# Altium PCB TCRT5000_pcb.PcbDoc
Units mm, origin at the board's own origin, x right, y up, seen from the top; angles counter-clockwise.
Board outline 110 x 45 mm, 2 copper layers (Top Layer, Bottom Layer), stack 1.58 mm thick; 29 components, 16 nets, 100 pads, 7 vias.
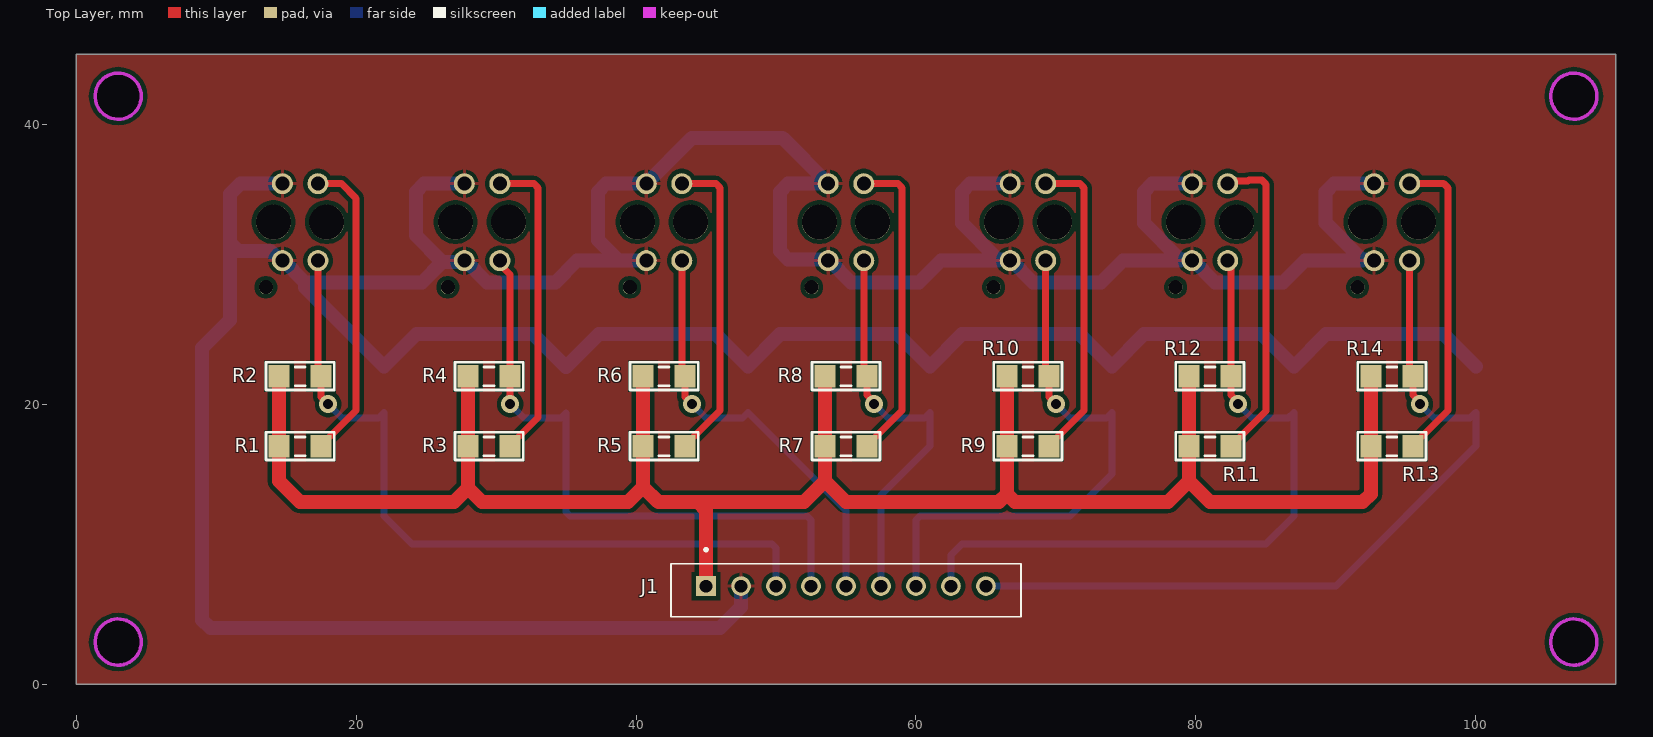
[diagram p0: Top Layer view]
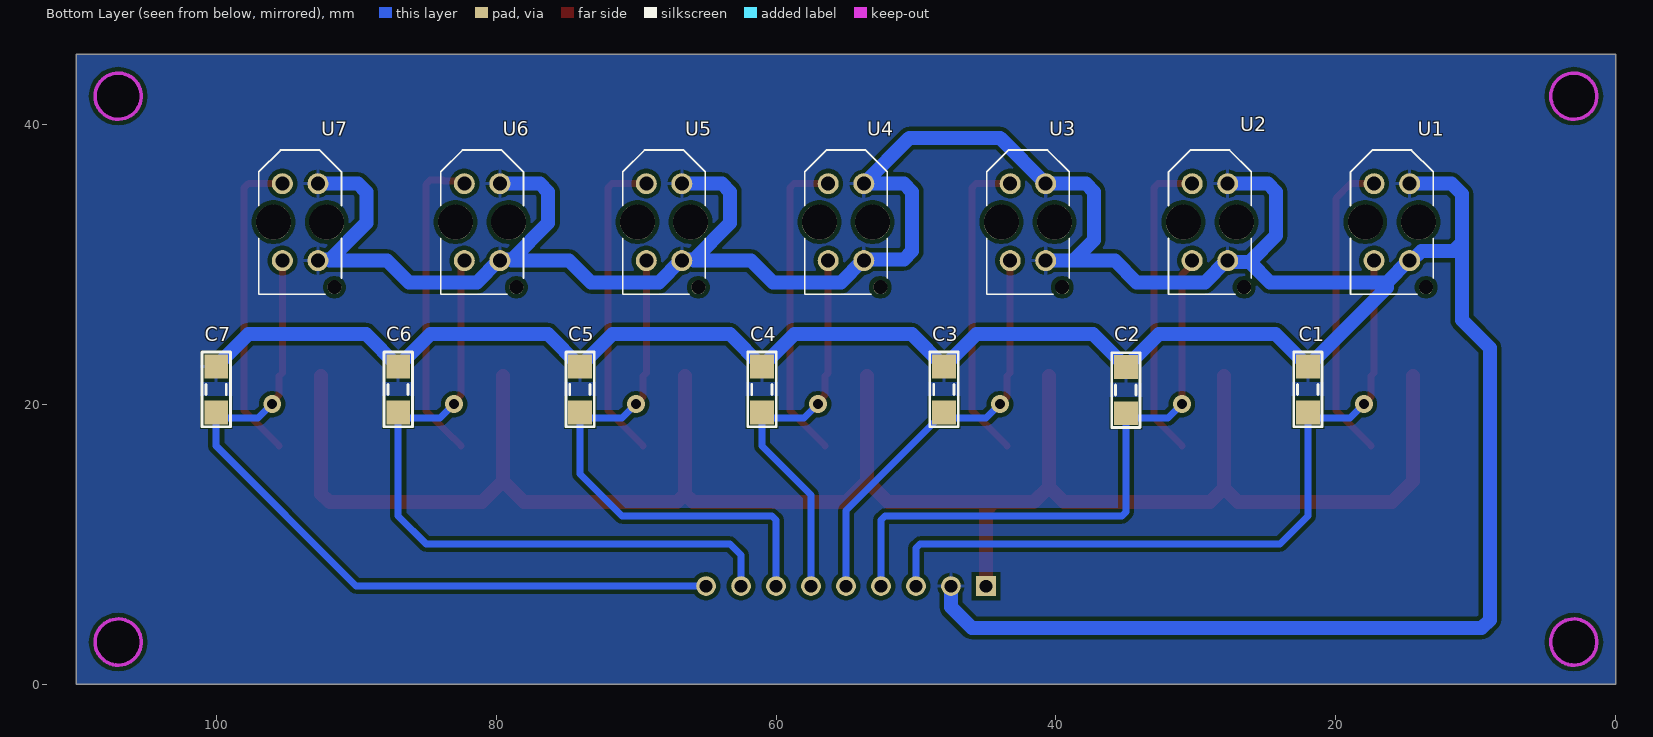
[diagram p1: Bottom Layer view, seen from below]
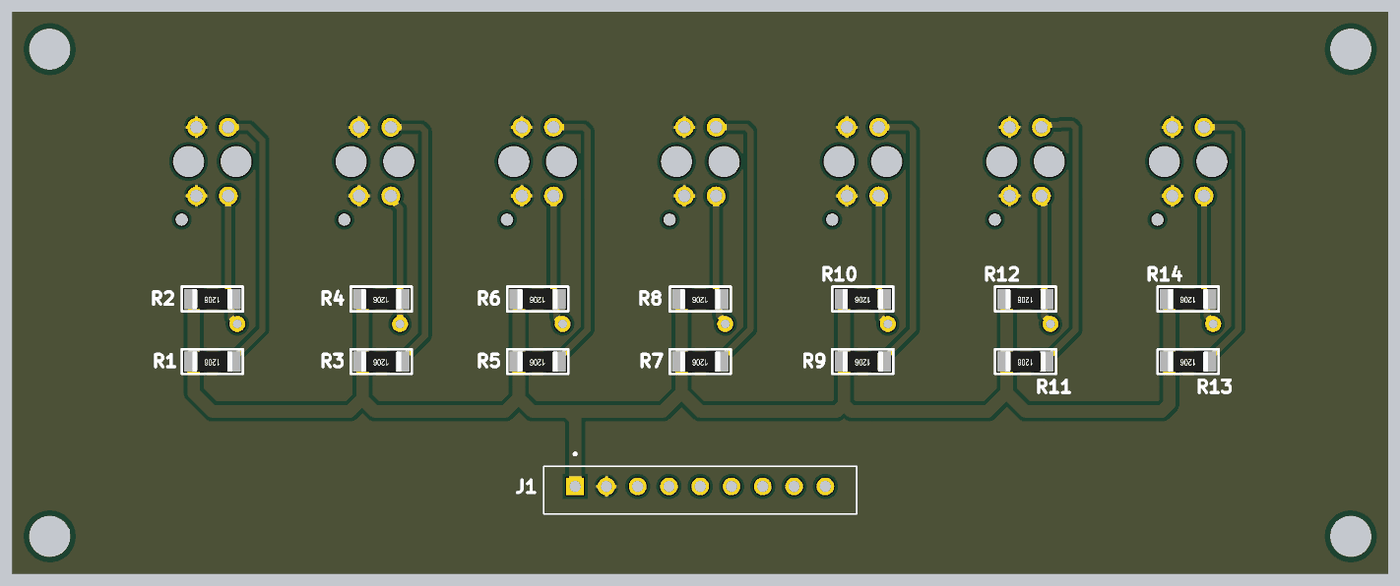
[diagram p2: 3D render of the assembled board from above, using the file's embedded part models]
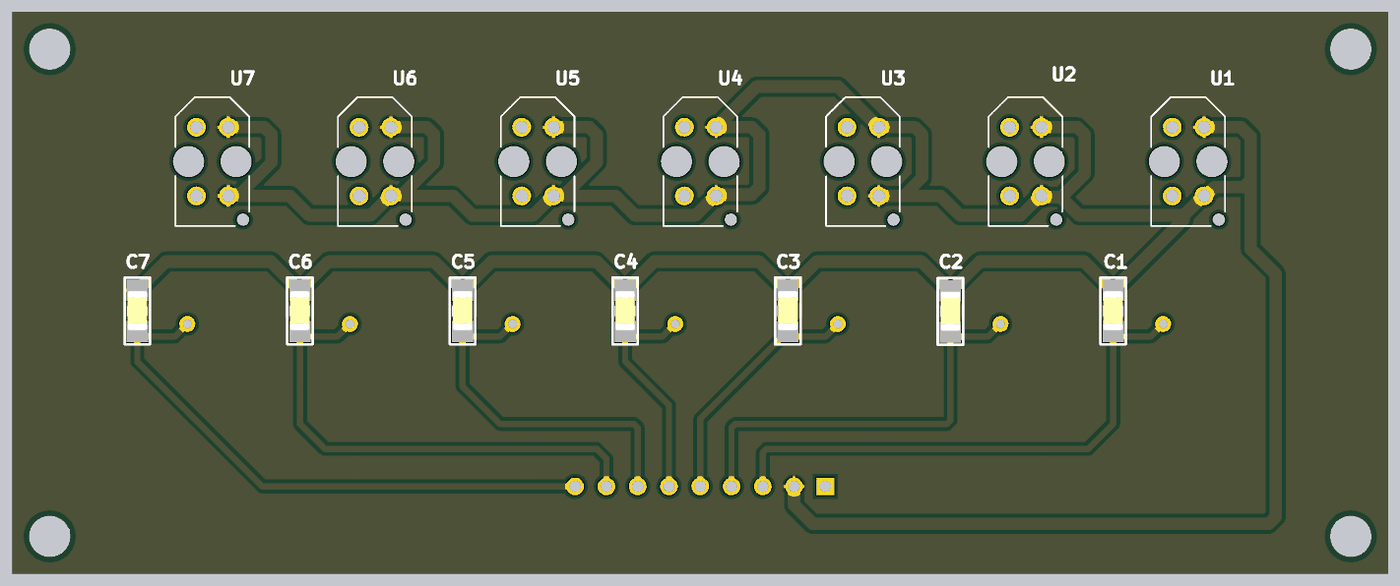
[diagram p3: 3D render of the assembled board from below, using the file's embedded part models]

## Layer stack, top to bottom
Top Solder: solder mask 0.01, Solder Resist, Dk 3.5
Top Layer: signal copper 0.035
Dielectric 1: dielectric 1.51, FR-4, Dk 4.8
Bottom Layer: signal copper 0.035
Bottom Solder: solder mask 0.01, Solder Resist, Dk 3.5

## Board outline
0,0 110,0 110,45 0,45
cut-out: 3,40.35 cw(c3,42) 1.35,42 cw(c3,42) 3,43.65 cw(c3,42) 4.65,42 cw(c3,42)
cut-out: 107,40.35 cw(c107,42) 105.35,42 cw(c107,42) 107,43.65 cw(c107,42) 108.65,42 cw(c107,42)
cut-out: 107,1.35 cw(c107,3) 105.35,3 cw(c107,3) 107,4.65 cw(c107,3) 108.65,3 cw(c107,3)
cut-out: 3,1.35 cw(c3,3) 1.35,3 cw(c3,3) 3,4.65 cw(c3,3) 4.65,3 cw(c3,3)

## Design rules (kind name [scope] priority, off if disabled: settings)
Clearance [All] p1: gap=0.3 ignorepadtopadclearanceinfootprint=FALSE
PolygonConnect [All] p1: connectstyle=Relief reliefconductorwidth=0.254 reliefentries=4 polygonreliefangle="90 Angle" airgapwidth=0.254
RoutingVias [All] p1: holewidth=0.711 width=1.27 viastyle="Through Hole" minholewidth=0.711 minwidth=1.27 maxholewidth=0.711 maxwidth=1.27
SilkToSolderMaskClearance [IsPad] p1: minsilkscreentomaskgap=0.1 clearancetoexposedcopper=TRUE
SolderMaskExpansion [All] p1: expansion=0.102 istentingtop=FALSE
Width GND [InNet('GND')] p1: maxlimit=1.5 minlimit=0.5 preferedwidth=1
Width 5V [InNet('+5')] p2: maxlimit=1.5 minlimit=0.5 preferedwidth=1
Width Signal [All] p3: maxlimit=0.8 minlimit=0.3 preferedwidth=0.5
29 further rules are at their usual default settings.

## Components (designator, comment, footprint, x,y, rotation, side; value= is the part's Value field where it differs from the comment)
C1 "104" "tu 1206" 21.997,21.046 r90 bottom
C2 "104" "tu 1206" 35,21 r90 bottom
C3 "104" "tu 1206" 47.997,21.046 r90 bottom
C4 "104" "tu 1206" 60.997,21.046 r90 bottom
C5 "104" "tu 1206" 73.997,21.046 r90 bottom
C6 "104" "tu 1206" 86.997,21.046 r90 bottom
C7 "104" "tu 1206" 99.997,21.046 r90 bottom
J1 "440052-9" TE_440052-9 55,7 r0 top
R1 "220R" "tro smd 1206" 16,17 r180 top
R2 "5.1k" "tro smd 1206" 16,22 r180 top
R3 "220R" "tro smd 1206" 29.5,17 r180 top
R4 "5.1k" "tro smd 1206" 29.5,22 r180 top
R5 "220R" "tro smd 1206" 42,17 r180 top
R6 "5.1k" "tro smd 1206" 42,22 r180 top
R7 "220R" "tro smd 1206" 55,17 r180 top
R8 "5.1k" "tro smd 1206" 55,22 r180 top
R9 "220R" "tro smd 1206" 68,17 r180 top
R10 "5.1k" "tro smd 1206" 68,22 r180 top
R11 "220R" "tro smd 1206" 81,17 r180 top
R12 "5.1k" "tro smd 1206" 81,22 r180 top
R13 "220R" "tro smd 1206" 94,17 r180 top
R14 "5.1k" "tro smd 1206" 94,22 r180 top
U1 "TCRT5000" OPTO_TCRT5000 16,33 r90 bottom
U2 "TCRT5000" OPTO_TCRT5000 29,33 r90 bottom
U3 "TCRT5000" OPTO_TCRT5000 42,33 r90 bottom
U4 "TCRT5000" OPTO_TCRT5000 55,33 r90 bottom
U5 "TCRT5000" OPTO_TCRT5000 68,33 r90 bottom
U6 "TCRT5000" OPTO_TCRT5000 81,33 r90 bottom
U7 "TCRT5000" OPTO_TCRT5000 94,33 r90 bottom

## Footprints (in the part's own frame and the unit in brackets; to place one, negate y for a bottom-side part, rotate by r counter-clockwise, add the part's x,y. Pads: shape width x height; smd on the part's side, far side on the other; paste and mask are expansions set on the pad)
OPTO_TCRT5000 [mm]
  round 1.5 hole 1: A(2.75,1.27) CATH(2.75,-1.27) COLL(-2.75,1.27) E(-2.75,-1.27)
  round 1 hole 1 unplated: ""(-4.65,-2.45)
  round 2.5 hole 2.5 unplated: ""(0,-1.9) ""(0,1.9)
  silkscreen extent -5.15,-2.95 5.15,2.95
TE_440052-9 [mm]
  rect 1.408x1.408 hole 0.9: 1(-10,0)
  round 1.408 hole 0.9: 2(-7.5,0) 3(-5,0) 4(-2.5,0) 5(0,0) 6(2.5,0) 7(5,0) 8(7.5,0) 9(10,0)
  silkscreen extent -12.5,-2.2 12.5,2.7
"tro smd 1206" [mm]
  rect 1.5x1.6 smd: 1(-1.5,0) 2(1.5,0)
  silkscreen extent -2.44,-0.99 2.44,0.99, body extent -1.6,-0.8 1.6,0.8, height 0.6
"tu 1206" [mm]
  rect 1.7x1.7 smd: 1(-1.65,0) 2(1.65,0)
  silkscreen extent -2.67,-1.02 2.67,1.02, body extent -1.57,-0.8 1.63,0.8, height 0.94

## Part data
C1 C2 C3 C4 C5 C6 C7: library part "Tu 1206 104 50V 20%", "Dán", Chung_Loai=Dán, Don_Vi=Con, Ma_Hang=MH004544, So_Chan=2, Ten_Linh_Kien="Tụ 1206 104-0.1uF 20% 50V"
J1: Package=None, Availability=Unavailable, MP=440052-9, Price=None
R1 R3 R5 R7 R9 R11 R13: library part "Tro 1206 5% 220R", "Dán", Chung_Loai=Dán, Don_Vi=Con, Ma_Hang=MH005925, So_Chan=2, Ten_Linh_Kien="Trở 1206 5% 220R"
R2 R4 R6 R8 R10 R12 R14: library part "Tro 1206 1% 5.1k", "Dán", Chung_Loai=Dán, Don_Vi=Con, Ma_Hang=MH008811, So_Chan=2, Ten_Linh_Kien="Trở 1206 1% 5.1k"
U1 U2 U3 U4 U5 U6 U7: "950 nm 60 mA Through Hole Reflective Optical Sensor with Transistor Output", Package=None, Availability=Unavailable, MP=TCRT5000, Price=None

## Via types
v1: diameter 1.27, hole 0.711, Top Layer to Bottom Layer, 7 vias

## Nets (pads, with @x,y where several pads share a name; then routed paths per layer and width w, separated by ;. In a path a pad name is that pad's centre, name@x,y a point inside that pad or via, vN(x,y) a via of type N, cw(c..) or ccw(c..) an arc to the next point about the centre after c; other vN are vias at no path point)
+5: J1.1 R1.2 R2.2 R3.2 R4.2 R5.2 R6.2 R7.2 R8.2 R9.2 R10.2 R11.2 R12.2 R13.2 R14.2 | length 145
  Top Layer w1: R2.2 R1.2 14.5,14.5 16,13 27,13 28,14 ; R4.2 R3.2 28,14 ; R6.2 R5.2 40.5,14.086 ; J1.1 45,12.414 44.414,13 ; R8.2 R7.2 53.5,14.5 ; R10.2 R9.2 66.5,13.586 ; R12.2 R11.2 79.5,14.5 ; R14.2 R13.2 92.5,13.586 91.914,13 81,13 79.5,14.5 ; 28,14 29,13 39.414,13 40.5,14.086 ; 40.5,14.086 41.586,13 44.414,13 ; 44.414,13 52,13 53.5,14.5 ; 53.5,14.5 55,13 65.914,13 66.5,13.586 ; 66.5,13.586 67.086,13 78,13 79.5,14.5
GND: C1.2 C2.2 C3.2 C4.2 C5.2 C6.2 C7.2 J1.2 U1.CATH U1.E U2.CATH U2.E U3.CATH U3.E U4.CATH U4.E U5.CATH U5.E U6.CATH U6.E U7.CATH U7.E | length 325
  Top Layer w1: U4.E U4.E@53.826,30.154
  Bottom Layer w1: U1.CATH@14.634,35.846 U1.CATH 11.75,35.75 11,35 11,31.536 ; U2.CATH 24.862,35.75 24.276,35.164 24.276,32.032 26.154,30.154 ; U3.E@40.634,30.346 U3.E 38.75,30.25 ; J1.2 47.5,5.5 46,4 9.586,4 9,4.586 9,24 11,26 11,31.536 ; 65.855,30.25 61.78,30.25 60.23,28.7 55.362,28.7 53.812,30.25 U4.E 53.634,30.346 50.862,30.346 50.276,30.931 50.276,35.164 50.862,35.75 U4.CATH 50.48,39 43.98,39 U3.CATH 37.862,35.75 37.276,35.164 37.276,31.724 38.75,30.25 ; U5.CATH 63.862,35.75 63.276,35.164 63.276,32.925 65.855,30.346 66.634,30.346 U5.E 66.812,30.25 68.362,28.7 73.23,28.7 74.78,30.25 78.855,30.25 ; U6.CATH 76.862,35.75 76.276,35.164 76.276,32.925 78.855,30.346 79.634,30.346 U6.E 79.812,30.25 81.362,28.7 86.23,28.7 87.78,30.25 91.855,30.25 ; U7.E 92.634,30.346 91.855,30.346 89.276,32.925 89.276,35.164 89.862,35.75 U7.CATH ; C7.2 97.692,25 89.301,25 C6.2 84.692,25 76.301,25 C5.2 71.692,25 63.301,25 C4.2 58.692,25 50.301,25 C3.2 45.692,25 37.35,25 C2.2 32.65,25 24.301,25 C1.2 16.362,28.33 16.362,28.7 ; 11,31.536 11.586,30.95 13.895,30.95 14.595,30.25 U1.E 14.812,30.25 16.362,28.7 ; 16.362,28.7 24.7,28.7 26.154,30.154 ; 26.154,30.154 27.634,30.154 U2.E 27.812,30.25 29.362,28.7 34.23,28.7 35.78,30.25 38.75,30.25
NetR1_1: R1.1 U1.A | length 21.9
  Top Layer w0.5: U1.A 18.957,35.75 20,34.707 20,19.55 17.5,17.05 R1.1
NetR3_1: R3.1 U2.A | length 22.1
  Top Layer w0.5: U2.A 32.707,35.75 33,35.457 33,19.05 31,17.05 R3.1
NetR5_1: R5.1 U3.A | length 22.3
  Top Layer w0.5: U3.A 45.707,35.75 46,35.457 46,19.55 43.5,17.05 R5.1
NetR7_1: R7.1 U4.A | length 22.3
  Top Layer w0.5: U4.A 58.707,35.75 59,35.457 59,19.55 56.5,17.05 R7.1
NetR9_1: R9.1 U5.A | length 22.3
  Top Layer w0.5: U5.A 71.707,35.75 72,35.457 72,19.55 69.5,17.05 R9.1
NetR11_1: R11.1 U6.A | length 22.7
  Top Layer w0.5: U6.A 82.461,35.941 83.732,35.941 83.791,36 84.707,36 85,35.707 85,19.5 83.05,17.55 83,17.55 82.5,17.05 R11.1
NetR13_1: R13.1 U7.A | length 22.3
  Top Layer w0.5: U7.A 97.707,35.75 98,35.457 98,19.55 95.5,17.05 R13.1
S1: C1.1 J1.3 R2.1 U1.COLL | length 54.2
  Top Layer w0.5: U1.COLL 17.27,22.23 R2.1 17.5,20.5 v1(18,20)
  Bottom Layer w0.5: v1(18,20) 19,19 21.601,19 C1.1 21.997,12.003 24,10 49.707,10 50,9.707 J1.3
S2: C2.1 J1.4 R4.1 U2.COLL | length 44.6
  Top Layer w0.5: U2.COLL 30.27,29.979 31,29.249 R4.1 v1(31,20)
  Bottom Layer w0.5: v1(31,20) 32,19 34.65,19 C2.1 35,12.293 35.293,12 52.207,12 52.5,11.707 J1.4
S3: C3.1 J1.5 R6.1 U3.COLL | length 30.4
  Top Layer w0.5: U3.COLL 43.27,22.23 R6.1 43.5,20.5 v1(44,20)
  Bottom Layer w0.5: v1(44,20) 45,19 47.601,19 C3.1 55,12.392 J1.5
S4: C4.1 J1.6 R8.1 U4.COLL | length 29
  Top Layer w0.5: U4.COLL 56.27,22.23 R8.1 56.5,20.649 57,20.149 v1(57,20)
  Bottom Layer w0.5: v1(57,20) 58,19 60.601,19 C4.1 60.997,16.997 57.5,13.5 J1.6
S5: C5.1 J1.7 R10.1 U5.COLL | length 39.6
  Top Layer w0.5: U5.COLL 69.27,22.23 R10.1 69.5,20.5 v1(70,20)
  Bottom Layer w0.5: J1.7 60,11.707 60.293,12 70.993,12 73.997,15.003 C5.1 73.601,19 71,19 v1(70,20)
S6: C6.1 J1.8 R12.1 U6.COLL | length 50.4
  Top Layer w0.5: U6.COLL 82.5,30.02 R12.1 82.5,20.649 83,20.149 v1(83,20)
  Bottom Layer w0.5: J1.8 62.5,9.207 63.293,10 84.993,10 86.997,12.003 C6.1 86.601,19 84,19 v1(83,20)
S7: C7.1 J1.9 R14.1 U7.COLL | length 56.7
  Top Layer w0.5: U7.COLL 95.27,22.23 R14.1 95.5,20.649 96,20.149 v1(96,20)
  Bottom Layer w0.5: J1.9 90,7 99.997,16.997 C7.1 99.601,19 97,19 v1(96,20)
pads on no net: U1. U2. U3. U4. U5. U6. U7.

## Polygon pours and split planes (outlines as drawn)
GND on Bottom Layer "GND_L02_P000" (solid, pour order 0): 0,45 110,45 110,0 0,0
GND on Top Layer "GND_L01_P001" (solid, pour order 1): 0,45 0,0 110,0 110,45

## Keep-outs
Keep-Out Layer:
  circle w0.254: c107,3 r1.65
  circle w0.254: c107,42 r1.65
  circle w0.254: c3,42 r1.65
  circle w0.254: c3,3 r1.65